# Altium PCB ft600.PcbDoc
Units mil, origin at the board's own origin, x right, y up, seen from the top; angles counter-clockwise.
Board outline 2000 x 1700 mil, 2 copper layers (Top Layer, Bottom Layer); 36 components, 41 nets, 168 pads, 31 vias.
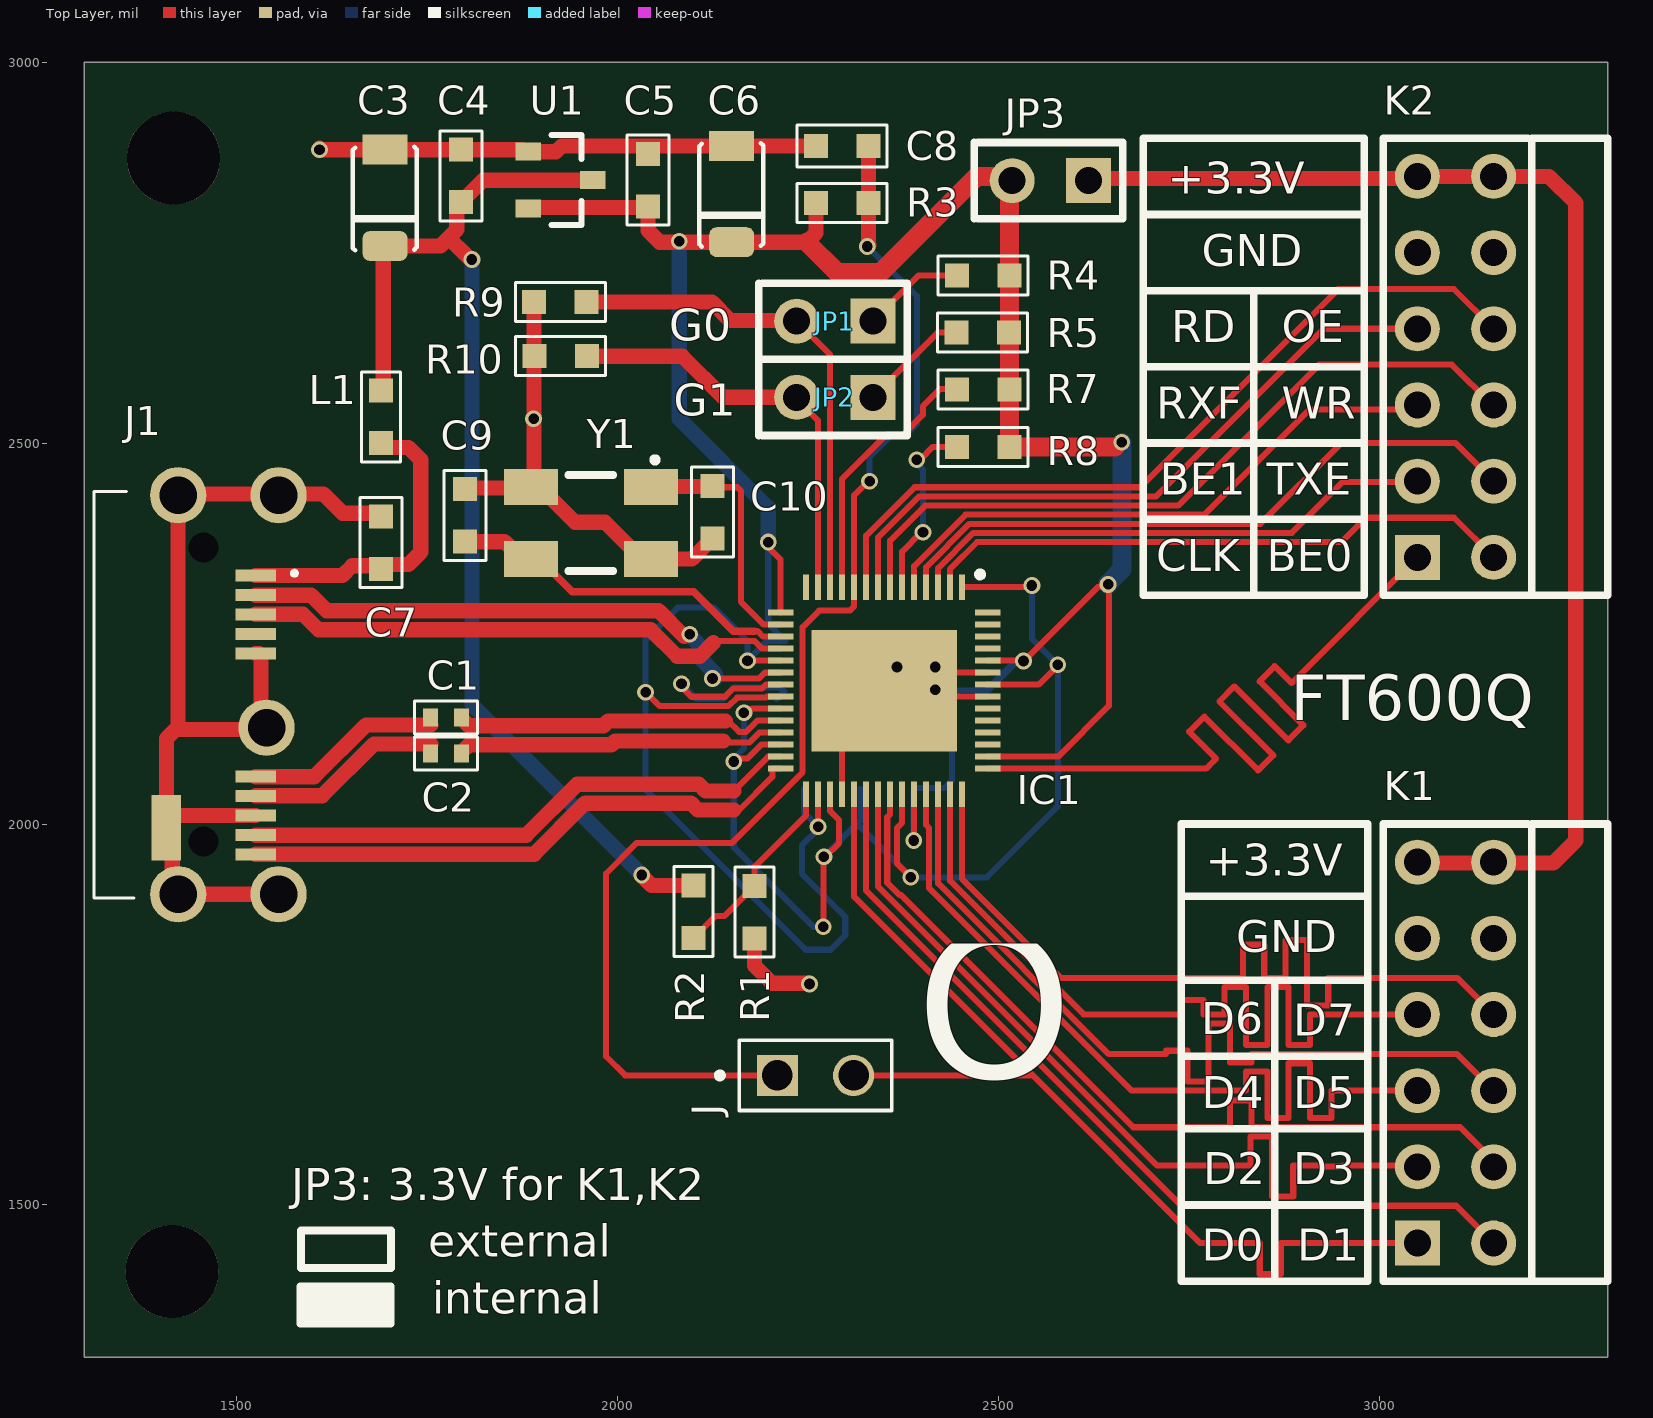
[diagram p0: Top Layer view]
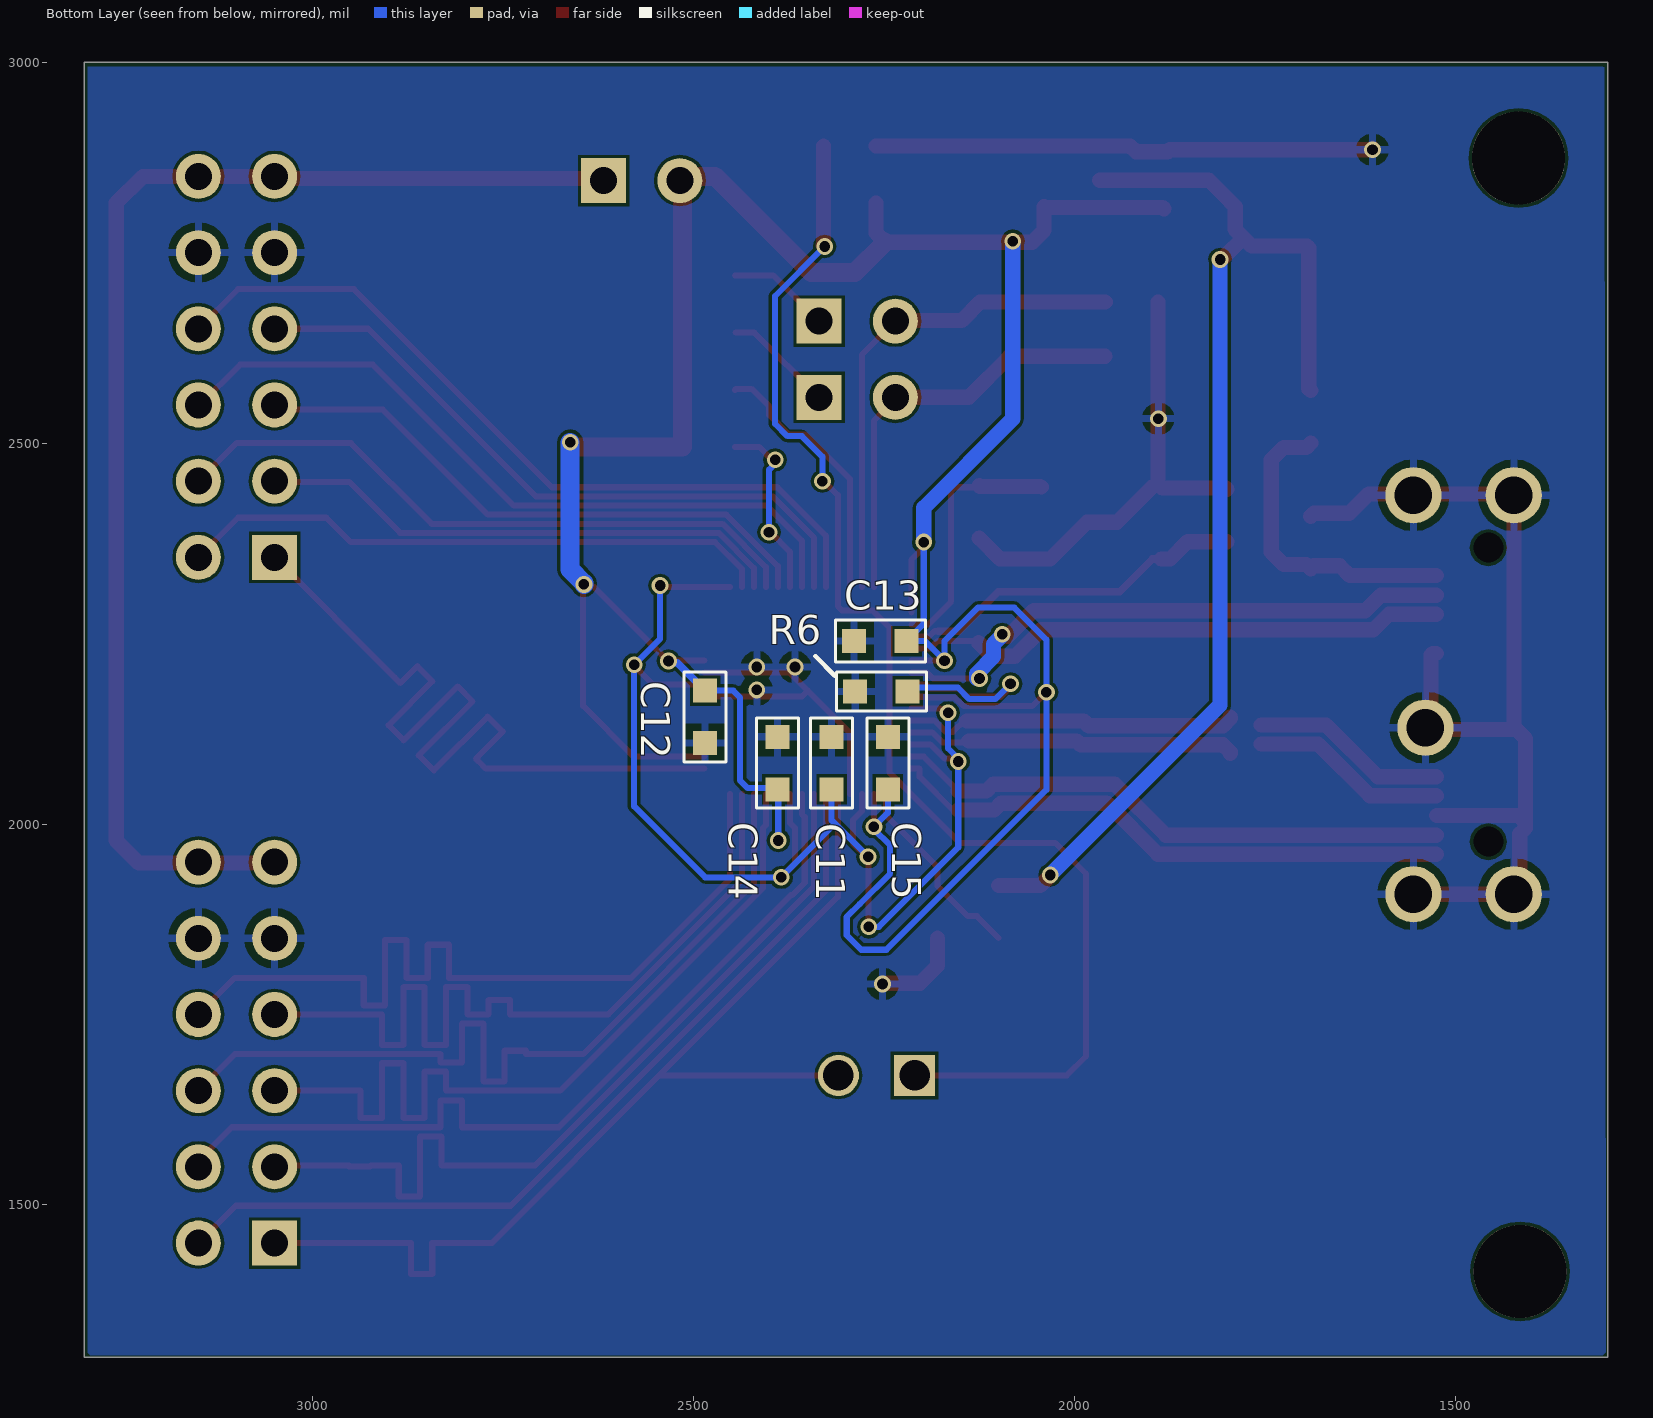
[diagram p1: Bottom Layer view, seen from below]
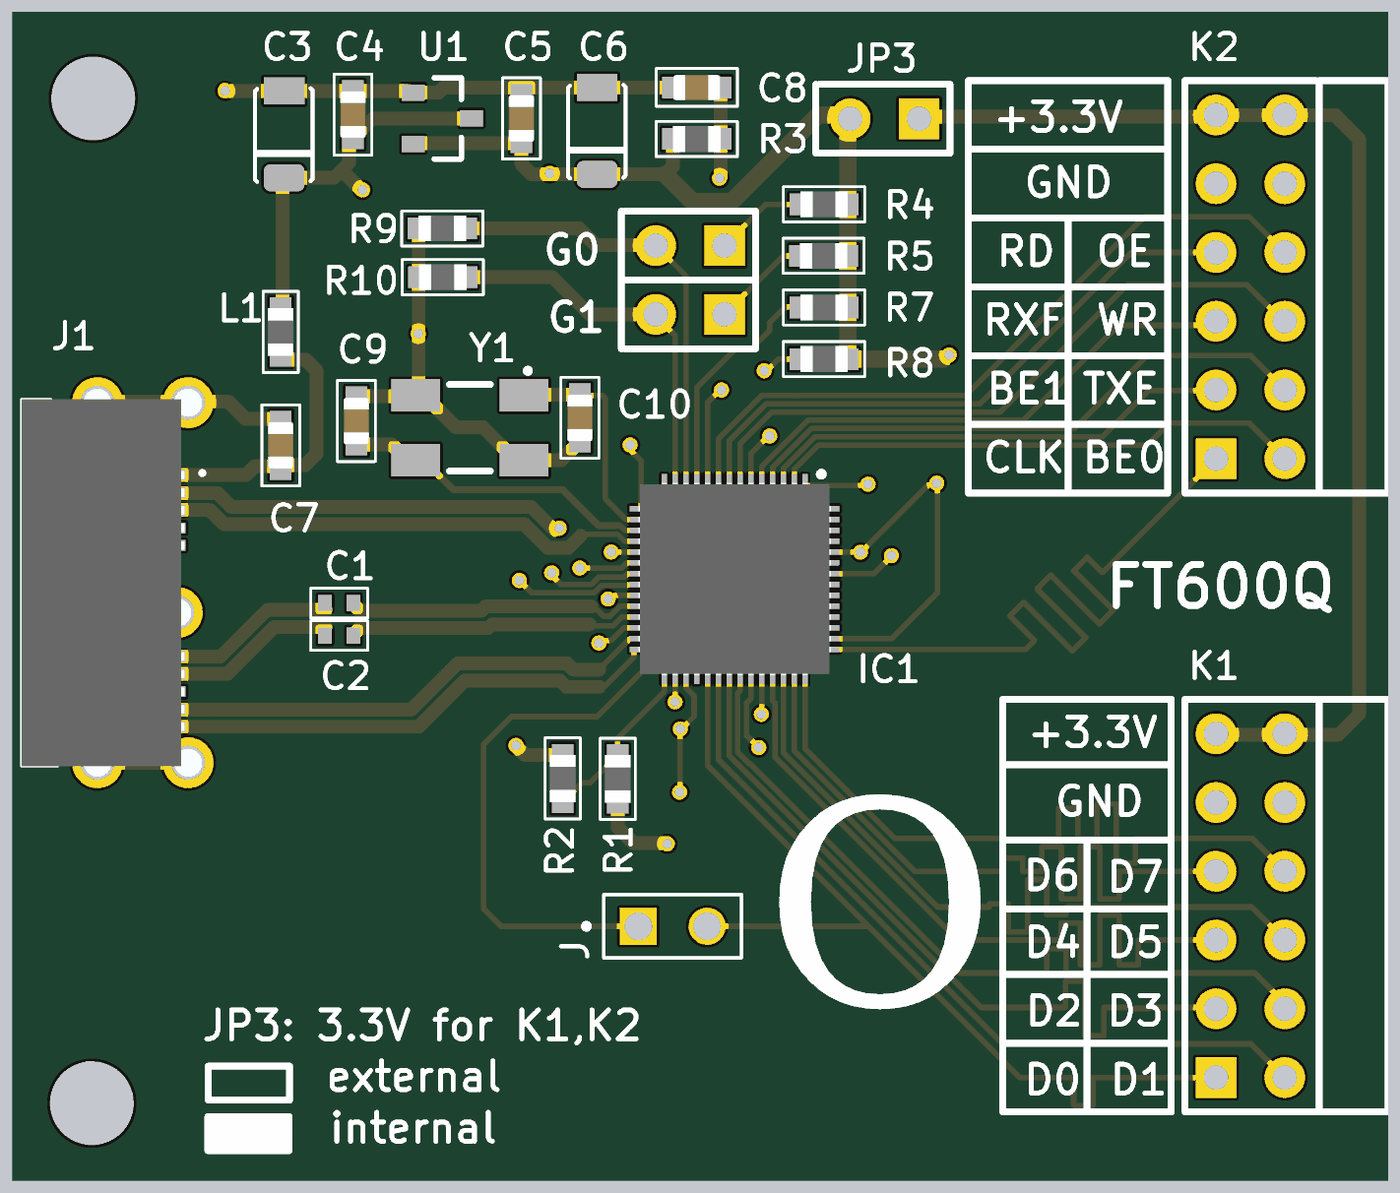
[diagram p2: 3D render of the assembled board from above, using the file's embedded part models]
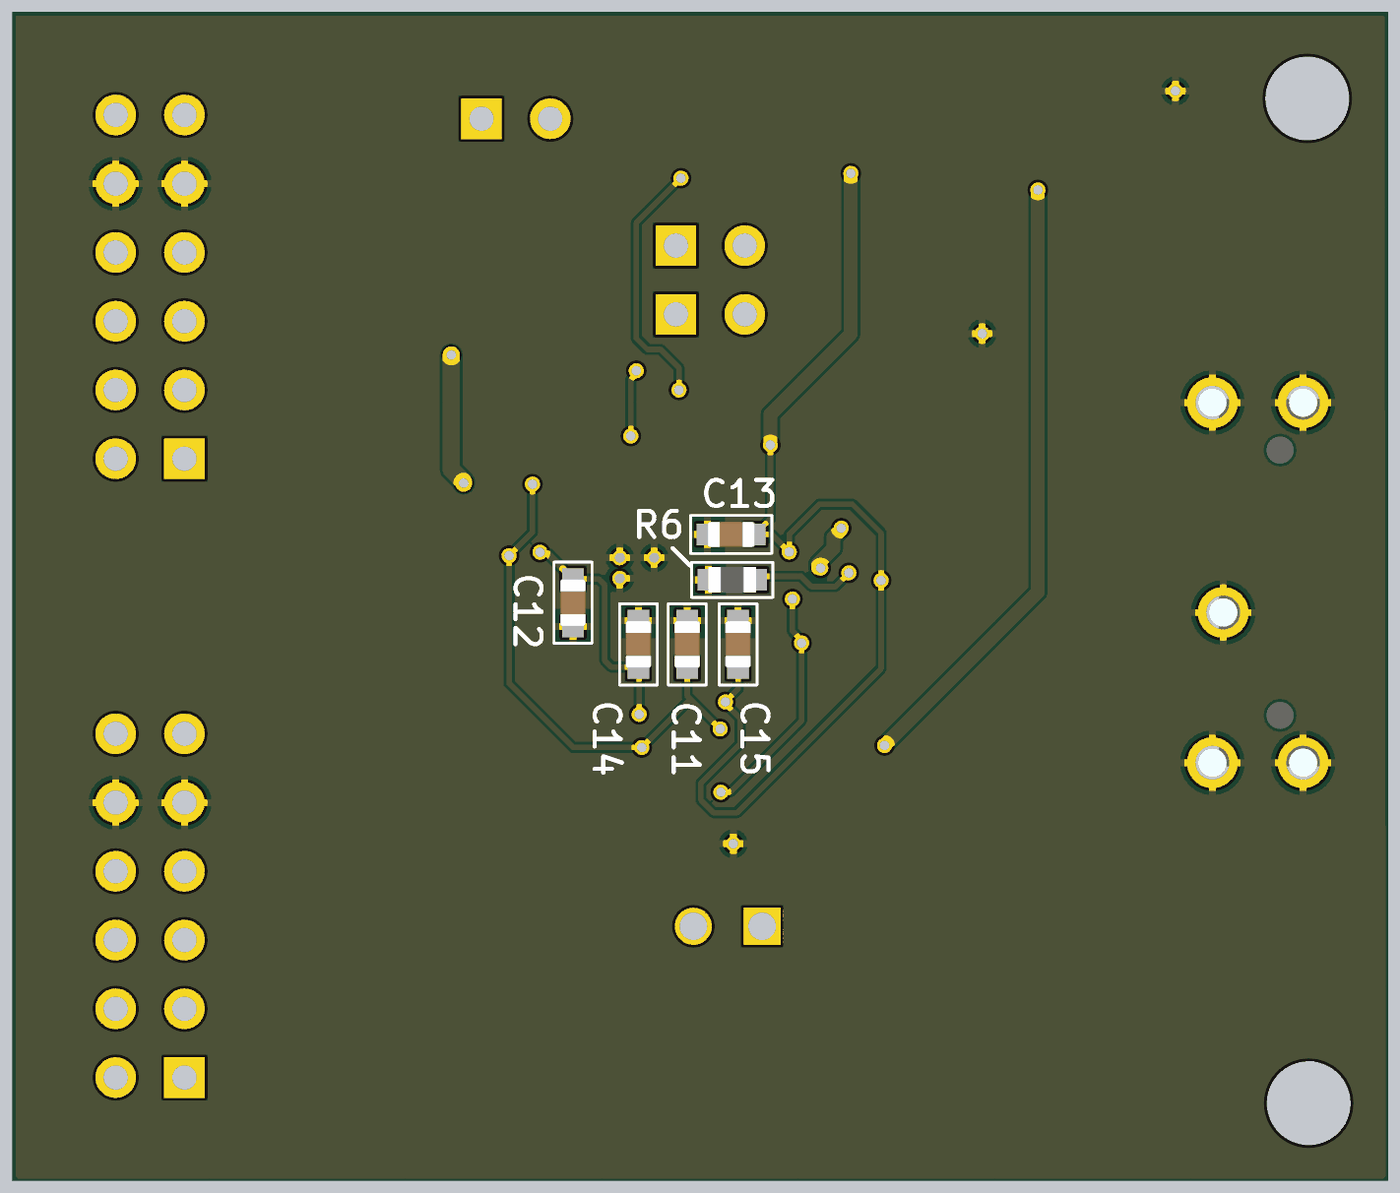
[diagram p3: 3D render of the assembled board from below, using the file's embedded part models]

## Layer stack, top to bottom
Top Solder: solder mask 0.4, Solder Resist, Dk 3.5
Top Layer: signal copper 1.4
Dielectric 1: dielectric 12.6, FR-4, Dk 4.8
Bottom Layer: signal copper 1.4
Bottom Solder: solder mask 0.4, Solder Resist, Dk 3.5

## Board outline
1300,1300 3300,1300 3300,3000 1300,3000

## Design rules (kind name [scope] priority, off if disabled: settings)
Clearance [All] p1: gap=4 ignorepadtopadclearanceinfootprint=FALSE
DiffPairsRouting [All] p1: maxlimit=10 minlimit=5 mostfreqgap=5 toplayer_minwidth=8 toplayer_maxwidth=20 toplayer_prefwidth=20 bottomlayer_minwidth=8 bottomlayer_maxwidth=20 bottomlayer_prefwidth=20 maxuncoupledlength=200
HoleSize [All] p1: absolutevalues=TRUE maxlimit=200 minlimit=1 maxpercent=80.000 minpercent=20.000
MatchedLengths [InNetClass('data')] p1: tolerance=10 checknetsindiffpair=FALSE checkdiffpairvsdiffpair=TRUE checkxsignals=TRUE checkothers=TRUE
MinimumSolderMaskSliver [All] p1: minsoldermaskwidth=0
PolygonConnect [All] p1: connectstyle=Relief reliefconductorwidth=10 reliefentries=4 polygonreliefangle="90 Angle" airgapwidth=10
RoutingVias [All] p1: holewidth=16 width=26 viastyle="Through Hole" minholewidth=14 minwidth=22 maxholewidth=16 maxwidth=26
SilkToSilkClearance [All] p1: silktosilkclearance=7
SilkToSolderMaskClearance [IsPad] p1: minsilkscreentomaskgap=4 clearancetoexposedcopper=TRUE
SolderMaskExpansion [All] p1: expansion=4
Width [All] p1: maxlimit=50 minlimit=6 preferedwidth=10
25 further rules are at their usual default settings.

## Classes and differential pairs
net class data: CLK D0 D1 D2 D3 D4 D5 D6 D7
differential pair tx: +tx_P -tx_N
differential pair t: +t_P -t_N
differential pair rx: +rx_P -rx_N
differential pair d: +d_P -d_N

## Components (designator, comment, footprint, x,y, rotation, side; value= is the part's Value field where it differs from the comment)
C1 "cap0402" SM0402_3D_cap 1775,2140 r0 top value=0.1
C2 "cap0402" SM0402_3D_cap 1775,2092.75 r0 top value=0.1
C3 "CAP_POL_SMA" "CAP_POL_SMA (3216)" 1695,2758.78 r90 top
C4 "cap0603" "SM0603 _3D_cap" 1795,2850.55 r270 top value=0.1
C5 "cap0603" "SM0603 _3D_cap" 2040,2845 r270 top value=0.1
C6 "CAP_POL_SMA" "CAP_POL_SMA (3216)" 2150,2763.78 r90 top
C7 "cap0603" "SM0603 _3D_cap" 1690,2369.45 r270 top value=0.1uf
C8 "cap0603" "SM0603 _3D_cap" 2295,2890 r0 top value=0.1uf
C9 "cap0603" "SM0603 _3D_cap" 1800,2405 r270 top value=18pf
C10 "cap0603" "SM0603 _3D_cap" 2125,2409.45 r270 top value=18pf
C11 "cap0603" "SM0603 _3D_cap" 2318.97,2080 r270 bottom value=4.7uf
C12 "cap0603" "SM0603 _3D_cap" 2485,2140.55 r90 bottom value=0.1
C13 "cap0603" "SM0603 _3D_cap" 2255,2240 r180 bottom value=0.1
C14 "cap0603" "SM0603 _3D_cap" 2390,2080 r270 bottom value=0.1
C15 "cap0603" "SM0603 _3D_cap" 2245,2080 r270 bottom value=0.1
IC1 "FT600Q-T" QFN40P700X700X90-57N-D 2350,2175 r270 top
J "4-103321-4" TE_4-103321-4 2210,1670 r0 top
J1 "GSB343T33HR" GSB343T33HR 1429.33,2169.68 r270 top
JP1 "JUMPER2" JUMPER2 2335.32,2659.97 r270 top
JP2 "JUMPER2" JUMPER2 2335.32,2559.97 r270 top
JP3 "JUMPER2" JUMPER2 2618.11,2844.49 r270 top
K1 "PMOD_6x2_ra_male" PMOD_6x2_right_ANGLE 3050,1450 r90 top
K2 "PMOD_6x2_ra_male" PMOD_6x2_right_ANGLE 3050,2350 r90 top
L1 "75R@100MHz" SM0603_3D_res 1690,2534.45 r90 top
R1 "10k" SM0603_3D_res 2180,1884.45 r270 top value=4k7
R2 "4k7" SM0603_3D_res 2100,1885 r90 top
R3 "10k" SM0603_3D_res 2295,2815 r180 top value=4k7
R4 "2k" SM0603_3D_res 2480,2720 r180 top value=4k7
R5 "2k" SM0603_3D_res 2479.45,2645 r180 top value=4k7
R6 "1.6k 1%" SM0603_3D_res 2253.45,2173.97 r180 bottom value=4k7
R7 "4k7" SM0603_3D_res 2480,2570 r180 top
R8 "4k7" SM0603_3D_res 2480,2495 r180 top
R9 "36k" SM0603_3D_res 1925,2685 r180 top value=4k7
R10 "36k" SM0603_3D_res 1925.55,2613.97 r180 top value=4k7
U1 "XC6206" SOT-23 1925,2845 r0 top
Y1 "ABM3B-30MHZ" ABM3B 1965,2395 r180 top

## Footprints (in the part's own frame and the unit in brackets; to place one, negate y for a bottom-side part, rotate by r counter-clockwise, add the part's x,y. Pads: shape width x height; smd on the part's side, far side on the other; paste and mask are expansions set on the pad)
ABM3B [mm]
  rect 1.8x1.2 smd: 1(-2,-1.2) 2(2,-1.2) 3(2,1.2) 4(-2,1.2)
  silkscreen extent -2.2,-2.16 0.75,1.6
"CAP_POL_SMA (3216)" [mm] "tantalum capacitor SMA"
  rrect50% 1x1.5 smd: 1(-0.004,0)
  rect 1x1.5 smd: 2(3.206,0)
  silkscreen extent -0.15,-1.05 3.3,1.08
GSB343T33HR [mm]
  rect 0.4x1.35 smd: 1(-3.975,2.43) 2(-3.325,2.43) 3(-2.675,2.43) 4(-2.025,2.43) 5(-1.375,2.43) 6(2.725,2.43) 7(3.375,2.43) 8(4.025,2.43) 9(4.675,2.43) 10(5.325,2.43)
  round 1.875 hole 1.25: MH1(-6.65,-0.15) MH2(6.65,-0.15) MH3(6.65,3.2) MH4(1.1,2.8) MH5(-6.65,3.2)
  round 0.5 hole 1 unplated: MH6(-4.9,0.7) MH7(4.9,0.7)
  rect 2.18x0.98 smd: MP1(4.44,-0.54)
  silkscreen extent -6.78,-2.95 6.78,3.77, body extent -7.17,-2.95 7.17,3.72, height 5.35
JUMPER2 [mm]
  rect 1.5x1.5 hole 0.9: 1(0,0)
  round 1.5 hole 0.9: 2(0,-2.54)
  silkscreen extent -1.27,-3.81 1.27,1.14
PMOD_6x2_right_ANGLE [mm] "2.54 mm right angle 6x2 pins"
  rect 1.5x1.5 hole 0.9: 1(0,0)
  round 1.5 hole 0.9: 2(2.54,0) 3(5.08,0) 4(7.62,0) 5(10.16,0) 6(12.7,0) 7(0,-2.54) 8(2.54,-2.54) 9(5.08,-2.54) 10(7.62,-2.54) 11(10.16,-2.54) 12(12.7,-2.54)
  silkscreen extent -1.27,-6.35 13.97,1.14
QFN40P700X700X90-57N-D [mm]
  rect 0.85x0.2 smd: 1(-3.45,2.6) 2(-3.45,2.2) 3(-3.45,1.8) 4(-3.45,1.4) 5(-3.45,1) 6(-3.45,0.6) 7(-3.45,0.2) 8(-3.45,-0.2) 9(-3.45,-0.6) 10(-3.45,-1) 11(-3.45,-1.4) 12(-3.45,-1.8) 13(-3.45,-2.2) 14(-3.45,-2.6) 29(3.45,-2.6) 30(3.45,-2.2) 31(3.45,-1.8) 32(3.45,-1.4) 33(3.45,-1) 34(3.45,-0.6) 35(3.45,-0.2) 36(3.45,0.2) 37(3.45,0.6) 38(3.45,1) 39(3.45,1.4) 40(3.45,1.8) 41(3.45,2.2) 42(3.45,2.6)
  rect 0.2x0.85 smd: 15(-2.6,-3.45) 16(-2.2,-3.45) 17(-1.8,-3.45) 18(-1.4,-3.45) 19(-1,-3.45) 20(-0.6,-3.45) 21(-0.2,-3.45) 22(0.2,-3.45) 23(0.6,-3.45) 24(1,-3.45) 25(1.4,-3.45) 26(1.8,-3.45) 27(2.2,-3.45) 28(2.6,-3.45) 43(2.6,3.45) 44(2.2,3.45) 45(1.8,3.45) 46(1.4,3.45) 47(1,3.45) 48(0.6,3.45) 49(0.2,3.45) 50(-0.2,3.45) 51(-0.6,3.45) 52(-1,3.45) 53(-1.4,3.45) 54(-1.8,3.45) 55(-2.2,3.45) 56(-2.6,3.45)
  rect 4.05x4.85 smd: 57(0,0)
  silkscreen extent -3.97,3.1 -3.78,3.3, body extent -3.55,-3.55 3.55,3.55, height 0.9
SM0402_3D_cap [mm] "0402 cap"
  rect 0.5x0.6 smd: 1(-0.525,0) 2(0.525,0)
  silkscreen extent -1.05,-0.55 1.05,0.55, body extent -0.53,-0.25 0.53,0.25, height 0.4
"SM0603 _3D_cap" [mm] "standard  0603 inch size"
  rect 0.8x0.8 smd: 1(-0.875,0) 2(0.875,0)
  silkscreen extent -1.5,-0.7 1.5,0.7, body extent -0.87,-0.47 0.88,0.48, height 0.87
SM0603_3D_res [mm] "0603 inch resistor"
  rect 0.8x0.8 smd: 1(-0.875,0) 2(0.875,0)
  silkscreen extent -1.5,-0.65 1.5,0.65, body extent -0.87,-0.47 0.88,0.48, height 0.55
SOT-23 [mm] "SOT23_L from misc devices"
  rect 0.85x0.6 smd: 1(-1.075,0.95) 2(-1.075,-0.95) 3(1.075,0)
  silkscreen extent -0.3,-1.5 0.7,1.5, body extent -0.7,-1.5 0.7,1.5, height 1.1
TE_4-103321-4 [mm]
  rect 1.37x1.37 hole 1.02: 1(0,0)
  round 1.37 hole 1.02: 2(2.54,0)
  silkscreen extent -2.02,-1.17 3.81,1.17

## Part data
C1 C2: "Capacitor  0402 inch", LatestRevisionDate=17-Jul-2002, LatestRevisionNote="Re-released for DXP Platform.", PackageDescription="Radial Cap, Thru-Hole; 2 Leads; 0.3 in Pin Spacing", PackageReference=RAD-0.3, Published=8-Jun-2000, Publisher="Altium Limited"
C3 C6: "CAP_POL_SMA(3216)", ="22.0 uf"
C4 C5 C7 C8 C9 C10 C11 C12 C13 C14 C15: "Capacitor  0603 inch", LatestRevisionDate=17-Jul-2002, LatestRevisionNote="Re-released for DXP Platform.", PackageDescription="Radial Cap, Thru-Hole; 2 Leads; 0.3 in Pin Spacing", PackageReference=RAD-0.3, Published=8-Jun-2000, Publisher="Altium Limited"
IC1: "Integrated Circuit", Manufacturer_Name="FTDI Chip", Mouser Part Number=895-FT600Q-T, Arrow Part Number=FT600Q-T, Arrow Price/Stock=https://www.arrow.com/en/products/ft600q-t/ftdi-chip, Datasheet Link=http://www.farnell.com/datasheets/1975744.pdf, Height=0.9mm, Manufacturer_Part_Number=FT600Q-T, Mouser Price/Stock=https://www.mouser.com/Search/Refine.aspx?Keyword=895-FT600Q-T
J: "Conn Unshrouded Header HDR 2 POS 2.54mm Solder ST Thru-Hole Carton", Package=None, Digi-Key_Part_Number=A122847-ND, EU_RoHS_Compliance=Compliant, MF="TE Connectivity", MP=4-103321-4, SnapEDA_Link=https://www.snapeda.com/parts/4-103321-4/TE%20Connectivity%20AMP%20Connectors/view-part/2402753/?ref=snap
J1: "Connector", Manufacturer_Name=Amphenol, Mouser Part Number=523-GSB343T33HR, Arrow Part Number=GSB343T33HR, Arrow Price/Stock=https://www.arrow.com/en/products/gsb343t33hr/amphenol, Datasheet Link=https://componentsearchengine.com/Datasheets/2/GSB343T33HR.pdf, Height=5.25mm, Manufacturer_Part_Number=GSB343T33HR, Mouser Price/Stock=https://www.mouser.co.uk/ProductDetail/Amphenol-Commercial-Products/GSB343T33HR/?qs=8nwx9VzGl4wjI7K6xpTSyQ%3D%3D
K1 K2: "PMOD_6x2_right_angle"
L1: "chip inductance 0603", Case=0805, Manufacturer=MURATA, Manufacturer Part Number=BLM21BB750SN1D, Part Number=IND0805_MURATA_BLM21BB750SN1D, Power=700mA, Resistance=0.16R, Tolerance=±25%, Author="S. Jafar", Component Type=Standard, ComponentHeight=1.05mm, CreateDate=12/21/2015, LatestRevisionDate=12/21/2015, Mounted=Yes, Part Description="SMD EMIFIL Suppression Chip Ferrite Bead", Pin Count=2, SMD=Yes, Socket=No, Status=None, Table="Inductors SMD"
R1 R2 R3 R4 R5 R6 R7 R8 R9 R10: "Res_0603_EU", Case=1206, Manufacturer=GENERIC, Manufacturer1 ComponentHeight=0.65mm, Manufacturer1 Example="NIC COMPONENT", Manufacturer1 Part Number=NRC12F4701TRF, Manufacturer Part Number=R1206_4K7_1%_0.25W_100PPM, Power=0.25W, Tolerance=±1%, Author="CERN DEM JLC", Component Type=Standard, CreateDate=12/3/2007, HelpURL=\\cern.ch\dfs\Applications\Altium\Datasheets\R1206_NIC_NRC.pdf, LatestRevisionDate=3/13/2008, Mounted=Yes, Part Description="General Purpose Thick Film Chip Resistor", Part Number=R1206_4K7_1%_0.25W_100PPM, Pin Count=2, SMD=Yes, Socket=No, Status=Preferred, Table="Resistors SMD", TC=±100ppm/°C
U1: "SOT-23-3 ldo"
Y1: library part ABM3B-11.0592MHZ-10-1-U-T, "Crystal or Oscillator", Manufacturer_Name=ABRACON, Mouser Part Number=815-ABM3B-11.0592-T, Arrow Part Number=ABM3B-11.0592MHZ-10-1-U-T, Arrow Price/Stock=https://www.arrow.com/en/products/abm3b-11.0592mhz-10-1-u-t/abracon, Datasheet Link=https://abracon.com/Resonators/abm3b.pdf, Manufacturer_Part_Number=ABM3B-11.0592MHZ-10-1-U-T, Mouser Price/Stock=https://www.mouser.co.uk/ProductDetail/ABRACON/ABM3B-110592MHZ-10-1-U-T?qs=LMMkZCEv%2Ff1YUX89OuYUdg%3D%3D

## Free pads (board coordinates)
  round 122.05 hole 122.05 unplated: 0(1415.3,1412.68) 0(1417.32,2874.02)

## Via types
v1: diameter 22, hole 14, Top Layer to Bottom Layer, 31 vias

## Nets (pads, with @x,y where several pads share a name; then routed paths per layer and width w, separated by ;. In a path a pad name is that pad's centre, name@x,y a point inside that pad or via, vN(x,y) a via of type N, cw(c..) or ccw(c..) an arc to the next point about the centre after c; other vN are vias at no path point)
+3.3V: C5.2 C6.1 C12.2 C13.2 C14.2 C15.2 IC1.15 IC1.19 IC1.22 IC1.30 IC1.38 IC1.44 IC1.52 JP3.2 R3.2 R4.1 R5.1 R7.1 R8.1 U1.2 | length 4426.3
  Top Layer w8: v1(2037,2173) 2055,2155 2146,2155 2157,2166 2194.94,2166 2196,2167.06 2214.11,2167.06 IC1.22 ; v1@2170,2215 v1(2170.63,2214.37) IC1.19 ; v1@2197,2364 2214.17,2346.83 IC1.15 ; v1(2263.39,1996.39) IC1.30 ; v1(2388.87,1978.29) 2388.87,1982.87 2389.37,1983.37 IC1.38 ; IC1.44 2578.39,2088.39 2645,2155 2645,2313.5 v1(2644,2314.5) 2641.32,2311.82 2631.82,2311.82 v1@2540.58,2220.58 ; IC1.52 v1@2533,2214.37
  Top Layer w20: U1.2 1884.15,2809.07 2038.53,2809.07 C5.2 2040,2779 2055.38,2763.62 2081,2763.62 C6.1 2248.62,2763.62 2260.55,2775.55 R3.2
  Top Layer w25: 2248.62,2763.62 2288.25,2724 2346,2724 2472,2850 2517,2850 2514.45,2847.45 R4.1 2514.45,2645 R7.1 R8.1 v1@2653,2495
  Bottom Layer w8: v1(2198,2370) 2198,2262.55 C13.2 2196.26,2240 v1(2170.63,2214.37) 2170.63,2240.37 2127,2284 2079,2284 2037,2242 v1(2037,2173) 2037,2045 2247,1835 2280,1835 2299,1854 2299,1878 2282,1895 2242,1935 2242,1972 2263.39,1993.39 v1(2263.39,1996.39) 2245,2014.77 C15.2 ; v1@2388.87,1975.13 v1(2388.87,1978.29) 2388.87,2044.43 C14.2 2391.45,2047 2429,2047 2439,2057 2439,2166 2448,2175 C12.2
  Bottom Layer w10: C12.2 2521.7,2211.7 2530.7,2211.7 v1(2533,2214)
  Bottom Layer w20: v1(2081,2765) 2081,2532 2198,2415 v1(2198,2370)
  Bottom Layer w25: v1(2644,2314.5) 2644,2316 2662,2334 v1(2662,2501)
be0: IC1.2 K2.7 | length 786.7
  Top Layer w8: IC1.2 2436.68,2310.89 2436.68,2334.77 2471.91,2370 2950,2370 2982,2402 3098,2402 K2.7
be1: IC1.3 K2.2 | length 701.5
  Top Layer w8: IC1.3 2420.87,2335.93 2466.94,2382 2885,2382 2952,2449 3049,2449 K2.2
C47: C11.2 IC1.1 IC1.23 IC1.26 IC1.31 IC1.37 IC1.50 | length 1704.4
  Top Layer w8: v1(2152.67,2082) 2156.5,2085.83 2170.64,2085.83 2188.95,2104.13 IC1.26 ; v1@2166,2145 2168,2145 2174,2151 2176,2151 2176.38,2151.38 IC1.23 ; v1(2270,1865) 2270.5,1865.5 2270.5,1956.5 v1(2271,1957) 2273,1957 2291,1975 2291,2005 2279.2,2016.8 2279.2,2039.11 IC1.31 ; IC1.37 2373.62,2001.62 2367,1995 2367,1948 v1(2385,1930) ; IC1.1 2539.83,2310.83 v1@2540,2311 ; IC1.50 2552.87,2182.87 v1@2575,2205
  Bottom Layer w8: v1(2166,2146) 2166,2099.11 2152.67,2085.79 v1(2152.67,2082) 2152.67,1969.33 2257,1865 v1(2270,1865) ; v1(2271,1957) 2311,1997 ; C11.2 2318.96,2004.96 2311,1997 ; v1(2544,2313) 2544,2243 v1(2578,2209) 2578,2023 2485,1930 v1(2385,1930) 2318,1997 2311,1997
CLK: IC1.43 K2.1 | length 1141.8
  Top Layer w8: IC1.43 2772.64,2072.64 2783,2083 2785.83,2085.83 2750.47,2121.18 2770.27,2140.98 2840.98,2070.27 2860.78,2090.07 2790.07,2160.78 2809.87,2180.58 2880.58,2109.87 2900.38,2129.67 2842.84,2187.21 2862.64,2207 2884.82,2184.82 2892,2192 K2.1
D0: IC1.33 J.2 K1.1 | length 1379.5
  Top Layer w8: J.2@2310.63,1670.63 J.2 2545,1670 ; IC1.33 2310.63,1904.37 2545,1670 ; K1.1 2885,1450 2871,1450 2871,1409.39 2843,1409.39 2843,1450 2804,1450 2765,1450 2545,1670
D0_rst: C8.2 IC1.10 J.1 R3.1 | length 1729.8
  Top Layer w8: J.1 2010,1670 1985,1695 1985,1935 2025,1975 2150,1975 2243.11,2068.11 2243.11,2258.35 2264.76,2280 2305,2280 2310.57,2285.57 IC1.10 IC1.10 2310.63,2431.63 2327,2448 v1@2327,2449
  Top Layer w20: C8.2@2329.45,2890 R3.1 2329.45,2760.55 v1@2330,2760
  Bottom Layer w8: v1(2328,2758) 2393,2693 2393,2525 2377,2509 2358,2509 2331,2482 v1(2331,2450)
D1: IC1.34 K1.7 | length 1141.8
  Top Layer w8: IC1.34 2326.38,1912.62 2339.34,1899.66 2740,1499 3101,1499 K1.7
D2: IC1.35 K1.2 | length 1142.6
  Top Layer w8: IC1.35 2342.13,1917.87 2353,1907 2469,1791 2708,1552 2814,1552 2831,1552 2831,1590 2859,1590 2859,1511 2887,1511 2887,1552 2891,1552 2892,1552 2924,1552 2924,1550.5 2952,1550.5 2952,1552 2989,1552 3048,1552 K1.2
D3: IC1.36 K1.8 | length 1143.6
  Top Layer w8: IC1.36 2357.87,2012.75 2354.13,2009 2354.13,1922.84 2369.97,1907 2372,1907 2677,1602 2800,1602 2804,1602 2804,1637.36 2832,1637.36 2832,1602 2912,1602 3106,1602 3150,1558 K1.8
D4: IC1.39 K1.3 | length 1141.8
  Top Layer w8: IC1.39 2405.12,1998.75 2408.87,1995 2408.87,1916.13 2675,1650 2759,1650 2825,1650 2825,1674.92 2853,1674.92 2853,1614 2881,1614 2881,1686 2909,1686 2909,1614 2937,1614 2937,1650 2941,1650 K1.3
D5: IC1.40 K1.9 | length 1141.8
  Top Layer w8: IC1.40 2420.87,1922.13 2645,1698 2704,1698 2720,1698 2720,1702.37 2748,1702.37 2748,1662 2776,1662 2776,1738 2804,1738 2804,1686.92 2832,1686.92 2832,1698 2836,1698 3102,1698 K1.9
D6: IC1.41 K1.4 | length 1141.8
  Top Layer w8: IC1.41 2436.61,1925.39 2612,1750 2722,1750 2741,1750 2741,1768.99 2769,1768.99 2769,1750 2797,1750 2797,1786 2825,1786 2825,1710 2853,1710 2853,1786 2881,1786 2881,1710 2909,1710 2909,1750 2913,1750 K1.4
D7: IC1.42 K1.10 | length 1141.8
  Top Layer w8: IC1.42 2452.36,1927.64 2582,1798 2683,1798 2821,1798 2821,1841.52 2849,1841.52 2849,1798 2877,1798 2877,1848 2905,1848 2905,1762 2933,1762 2933,1798 2937,1798 3102,1798 K1.10
d_N: IC1.20 J1.2 | length 753.6
  Top Layer w8: v1(2124.85,2191) 2186,2191 2193.56,2198.56 2214.11,2198.56 IC1.20
  Top Layer w20: J1.2 1525.3,2300.3 1597.71,2300.3 1618,2280 2054,2280 v1@2087.67,2246.33
  Bottom Layer w20: v1(2095,2249) 2095,2247.38 2106.33,2236.05 2106.33,2219.67 2128.85,2197.15 2128.85,2191.15 2128.7,2191 v1(2124.85,2191)
d_P: IC1.18 J1.3 | length 724.4
  Top Layer w8: 2126,2238 2128,2240 2180,2240 2189.88,2230.12 IC1.18
  Top Layer w20: J1.3 1525.3,2275.3 1587.35,2275.3 1607.65,2255 2043.64,2255 2078.47,2220.18 2108.18,2220.18 2126,2238
g0: IC1.12 JP1.2 R9.1 | length 653.5
  Top Layer w8: JP1.2 2279.13,2616.16 IC1.12
  Top Layer w20: R9.1 2124,2685 2148,2661 2234.29,2661 JP1.2
g1: IC1.13 JP2.2 R10.1 | length 558.5
  Top Layer w8: JP2.2 2235.32,2557.37 2263.39,2529.3 IC1.13
  Top Layer w20: R10.1 2085.04,2613.96 2139.03,2559.97 JP2.2
GND: C3.2 C4.1 C5.1 C6.2 C7.1 C8.1 C9.1 C10.2 C11.1 C12.1 C13.1 C14.1 C15.1 IC1.32 IC1.49 IC1.51 IC1.57 J1.5 J1.8 J1.MH1 J1.MH2 J1.MH3 J1.MH4 J1.MH5 J1.MP1 K1.5 K1.11 K2.5 K2.11 R1.2 R6.1 R9.2 R10.2 U1.1 Y1.2 Y1.4 | length 3112
  Top Layer w8: IC1.32 2294.88,2119.88 IC1.57 ; IC1.49 2357.87,2167.13 IC1.57 ; IC1.51 2373.62,2198.62 IC1.57
  Top Layer w20: J1.8 1417.36,2011.22 J1.MP1@1408.07,2001.93 ; J1.5 1530.16,2223.82 1532.28,2221.69 1532.28,2133.66 J1.MH4 ; J1.MH4@1532.28,2124 1419.79,2124 ; J1.MH3 J1.MH2 1415.75,1915.55 1415.75,1987.2 J1.MP1 J1.MP1@1408.07,2001.93 ; v1@1609,2887 1611,2885 C3.2 C4.1 1875.16,2885 1877.76,2882.4 U1.1 1919.4,2882.4 1927,2890 C6.2 C8.1 ; C7.1 1685.9,2408 1639,2408 1614,2433 1424.93,2433 J1.MH1 1423.2,2431.28 1423.2,2127.42 1419.79,2124 ; C9.1 1801.4,2440.85 1884.86,2440.85 Y1.2 1890.55,2446.53 R9.2 ; Y1.2@1898.07,2442.24 1944.31,2396 1983.69,2396 2031.93,2347.76 Y1.4 2097.76,2347.76 C10.2 ; R1.2 2180,1814 2203,1791 v1@2250,1791 ; J1.MP1@1408.07,2001.93 1408.07,2112.28 1419.79,2124
  other v1: 2252,1790 2417,2176 2367,2206 2417,2206 1890,2532 1609,2885
NetC3_1: C3.1 C4.2 L1.2 R2.2 U1.3 | length 1530
  Top Layer w20: L1.2 1692.5,2571.4 1692.5,2756.12 C3.1 1767.62,2758.62 1778.44,2769.44 ; v1@1805,2743 1802,2746 1801.88,2746 1778.44,2769.44 ; U1.3 1823.9,2845 C4.2 1789.25,2810.35 1789.25,2780.25 1778.44,2769.44 ; v1@2031,1933 2044.55,1919.45 R2.2
  Bottom Layer w20: v1(1809,2741) 1809,2156 v1(2032,1933)
NetJP1_1: JP1.1 R4.2 | length 135.1
  Top Layer w8: JP1.1 2395.35,2720 R4.2
NetJP2_1: JP2.1 R5.2 | length 144.9
  Top Layer w8: JP2.1 2420.35,2645 R5.2
oe: IC1.9 K2.10 | length 1046.8
  Top Layer w8: IC1.9 2326.38,2378.38 2390,2442 2686,2442 2946,2702 3098,2702 K2.10
rd: IC1.8 K2.4 | length 886.6
  Top Layer w8: IC1.8 2342.13,2376.13 2396,2430 2707,2430 2927,2650 K2.4
ref: IC1.21 R6.2 | length 311.8
  Top Layer w8: v1(2084,2184) 2084,2180 2097,2167 2141,2167 2152,2178 2189.97,2178 2194.78,2182.81 2214.11,2182.81 IC1.21
  Bottom Layer w8: v1(2084,2184) 2104,2164 2138,2164 2153,2179 2213.97,2179 R6.2 R6.2@2209.03,2164
rx_N: IC1.27 J1.9 | length 736.7
  Top Layer w8: 2154.78,2045.22 2197.94,2088.39 IC1.27
  Top Layer w20: J1.9 1525.3,1985.33 1880.33,1985.33 1947.32,2052.32 2106.71,2052.32 2115.75,2043.28 2152.84,2043.28
rx_P: IC1.28 J1.10 | length 744.8
  Top Layer w8: 2158.27,2016.73 2203.31,2061.77 2203.31,2072.57 2203.37,2072.64 IC1.28
  Top Layer w20: J1.10 1525.3,1960.33 1890.69,1960.33 1957.68,2027.32 2096.35,2027.32 2105.39,2018.28 2152.84,2018.28
rxf: IC1.5 K2.3 | length 775.8
  Top Layer w8: IC1.5 2389.37,2338.37 2457,2406 2770,2406 2908,2544 3044,2544 K2.3
siwu: IC1.6 R8.2 | length 236.8
  Top Layer w8: IC1.6 2373.62,2357.62 2398,2382 v1@2399,2382 ; v1@2398,2477 2398,2479 2414,2495 R8.2
  Bottom Layer w8: v1(2393,2478) 2393,2473.13 2401,2465.13 v1(2401,2383)
t_N: C1.1 J1.6 | length 258.2
  Top Layer w20: J1.6 1525.3,2062.11 1602.11,2062.11 1670,2130 C1.1@1755,2130
t_P: C2.1 J1.7 | length 258.2
  Top Layer w20: J1.7 1525.3,2037.11 1612.46,2037.11 1680.36,2105 1755,2105
tx_N: C1.2 IC1.24 | length 437.4
  Top Layer w8: 2143.72,2137 2159.72,2121 2169,2121 2183.63,2135.63 IC1.24
  Top Layer w20: C1.2 1795.67,2138.35 1805.14,2128.88 1981.6,2128.88 1987.82,2135.1 2141.82,2135.1
tx_P: C2.2 IC1.25 | length 432.4
  Top Layer w8: 2139,2109 2141,2107 2173.38,2107 2186.27,2119.88 IC1.25
  Top Layer w20: C2.2 1795.67,2094.4 1805.14,2103.88 1991.95,2103.88 1997.08,2109 2139,2109
txe: IC1.4 K2.8 | length 859.4
  Top Layer w8: IC1.4 2405.12,2337.15 2461.97,2394 2844,2394 2950,2500 3100,2500 K2.8
VB: C7.2 J1.1 L1.1 | length 415.2
  Top Layer w20: J1.1 1639.18,2326.18 1652,2339 1686,2339 C7.2 1695.75,2340.75 1725.75,2340.75 1742,2357 1742,2478 1725.75,2494.25 1695.75,2494.25 L1.1
Vbus: IC1.29 R1.1 R2.1 | length 256.6
  Top Layer w8: R2.1 2128.44,1879 2140.1,1879 R1.1 2180,1944 2247.64,2011.64 IC1.29
Vcc: JP3.1 K1.6 K1.12 K2.6 K2.12 | length 1713.8
  Top Layer w20: JP3.1 2620.87,2847.24 3047.24,2847.24 K2.6 K2.12 3222.83,2850 3257.87,2814.96 3257.87,1978.35 3228.35,1948.82 3051.18,1948.82 K1.6
wake: IC1.11 R7.2 | length 348.5
  Top Layer w8: IC1.11 2294.88,2452.88 2353,2511 2375,2511 2401,2537 2401,2548 2424,2571 2444.55,2571 R7.2
wr: IC1.7 K2.9 | length 970.9
  Top Layer w8: IC1.7 2357.87,2371.87 2404,2418 2736,2418 2921,2603 3095,2603 3148,2550 K2.9
xi: C10.1 IC1.16 Y1.1 | length 331.7
  Top Layer w8: C10.1 2126.9,2442 2157.31,2442 2162,2437.31 2162,2292 2192.32,2261.68 2214.11,2261.68 IC1.16
  Top Layer w20: Y1.1 2044.57,2443.07 2124.17,2443.07 C10.1
xo: C9.2 IC1.17 Y1.3 | length 465.8
  Top Layer w8: 2179.62,2253 2184,2253 2191.07,2245.93 2214.11,2245.93 IC1.17
  Top Layer w10: Y1.3 1898.07,2347.76 1940.83,2305 2100,2305 2152,2253 2179.62,2253
  Top Layer w20: C9.2 1851.66,2370.55 1874.45,2347.76 Y1.3
pads on no net: IC1.14 IC1.45 IC1.46 IC1.47 IC1.48 IC1.53 IC1.54 IC1.55 IC1.56 J1.4 J1.MH6 J1.MH7

## Polygon pours and split planes (outlines as drawn)
GND on Bottom Layer "GND_L02_P000" (solid, pour order 0): 1305,2996 1307,2994 3295,2994 3295,1306 3292,1303 1303,1303

## Silkscreen, mask and mechanical layers (free items; w line width, h text height)
Top Overlay:
  lines w10: 1584.65,1387.8 1696.95,1387.8 1691.14,1381.99 1588.68,1381.99 1584.09,1377.4 1693.25,1377.4 1702.2,1368.44 1584.09,1368.44 1594.27,1358.27 1596,1360 1695,1360 1700,1355 1590,1355 1584.09,1349.09 1694.09,1349.09 ; 2690,2500 2980,2500 ; 2690,2800 2980,2800 ; 2695,2400 2980,2400 ; 2695,2600 2980,2600 ; 2695,2700 2975,2700 ; 2740,1500 2985,1500 ; 2740,1600 2985,1600 ; 2740,1695 2985,1695 ; 2740,1795 2985,1795 ; 2740,1905 2985,1905 ; 2835,2300 2835,2695 ; 2862.5,1400 2862.5,1795 ; 1584.09,1343.84 1584.09,1393.05 1702.2,1393.05 1702.2,1343.84 1584.09,1343.84 ; 1584.65,1417.32 1702.76,1417.32 1702.76,1466.54 1584.65,1466.54 1584.65,1417.32 ; 2690,2300 2690,2310 2690,2900 2980,2900 2980,2300 2690,2300 ; 2740,1400 2985,1400 2985,2000 2740,2000 2740,1400
  text "+3.3V" at 2722,2827 h42
  text "GND" at 2767,2732 h42
  text "G0" at 2068,2634 h42
  text "RD" at 2727,2632 h42
  text "OE" at 2872,2632 h42
  text "G1" at 2074,2536 h42
  text "RXF" at 2707,2532 h42
  text "WR" at 2872,2532 h42
  text "BE1" at 2712,2432 h42
  text "TXE" at 2852,2432 h42
  text "CLK" at 2707,2332 h42
  text "BE0" at 2852,2332 h42
  text "FT600Q" at 2884.02,2135.98 h60
  text "+3.3V" at 2772,1932 h42
  text "GND" at 2812,1832 h42
  text "D6" at 2766,1724 h42
  text "D7" at 2887,1722 h42
  text "D4" at 2767,1627 h42
  text "D5" at 2887,1627 h42
  text "O" at 2391.73,1555.12 h590.55
  text "D2" at 2769,1527 h42
  text "D3" at 2887,1527 h42
  text "JP3: 3.3V for K1,K2" at 1572,1506 h42
  text "external" at 1752,1432 h42
  text "D0" at 2767,1427 h42
  text "D1" at 2892,1427 h42
  text "internal" at 1757,1357 h42
Bottom Overlay:
  lines w6: 2314.56,2194.56 2340,2220
Mechanical 1:
  the board outline again, w10